# EAGLE board tree-3d-r1-top (EAGLE 5.12)
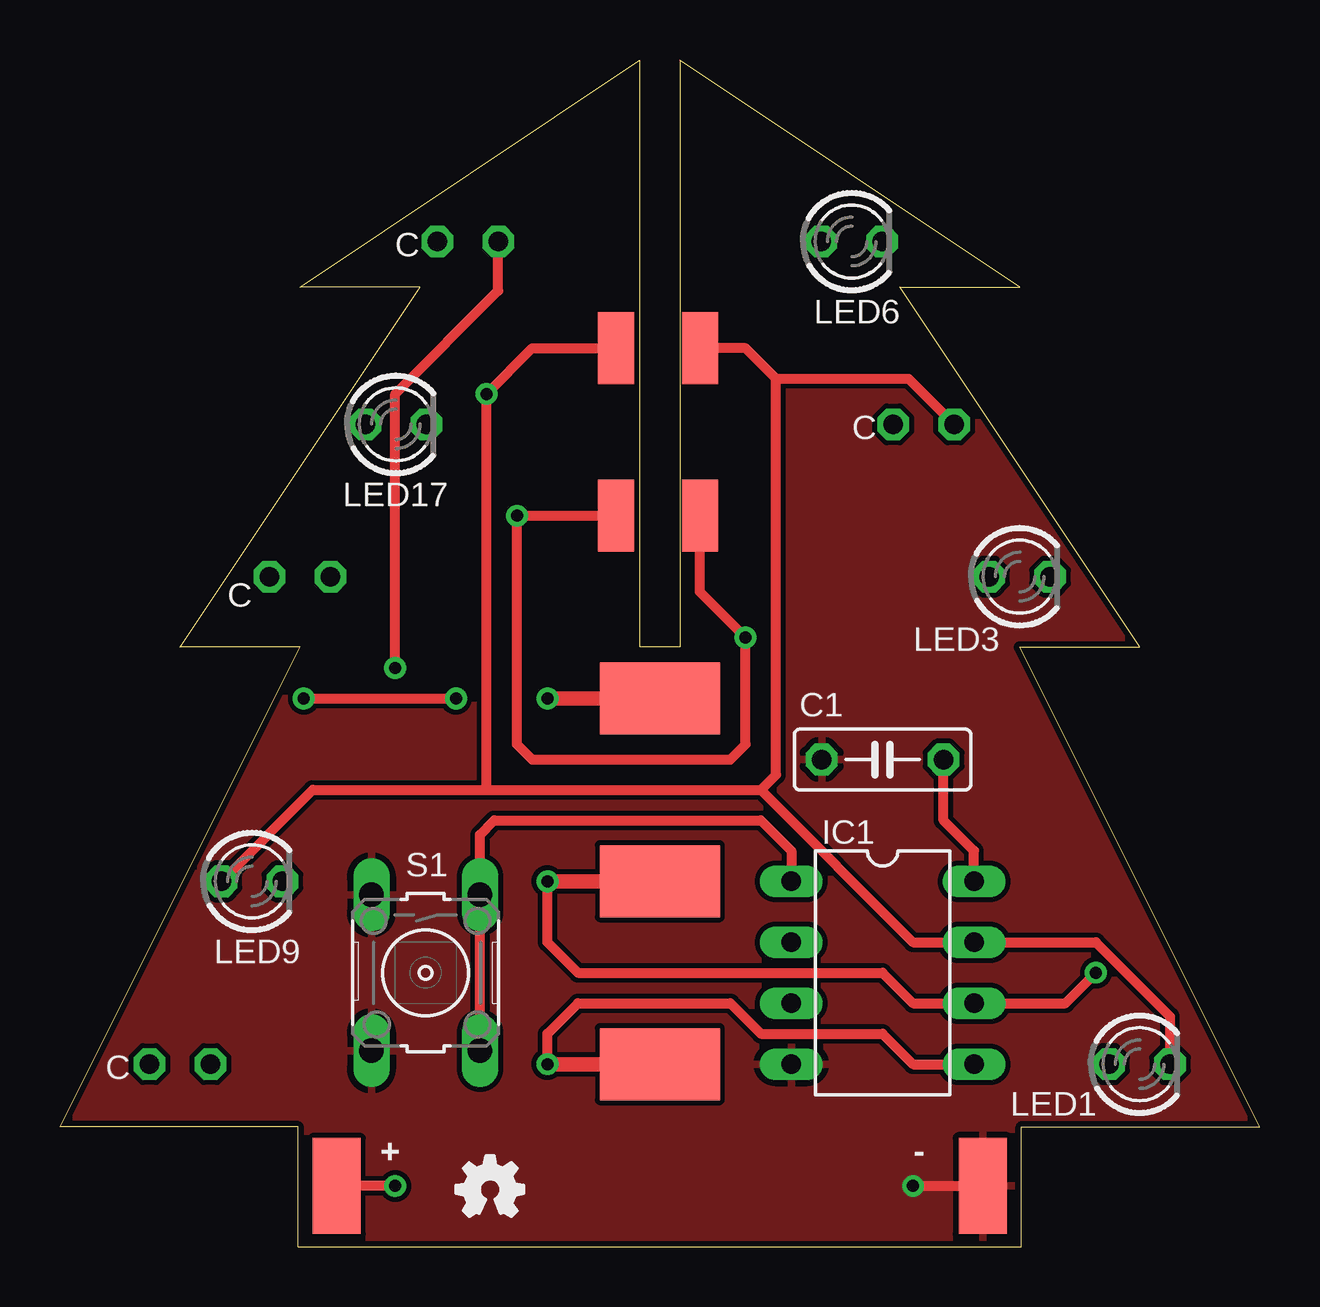
[diagram p0: board, top side]
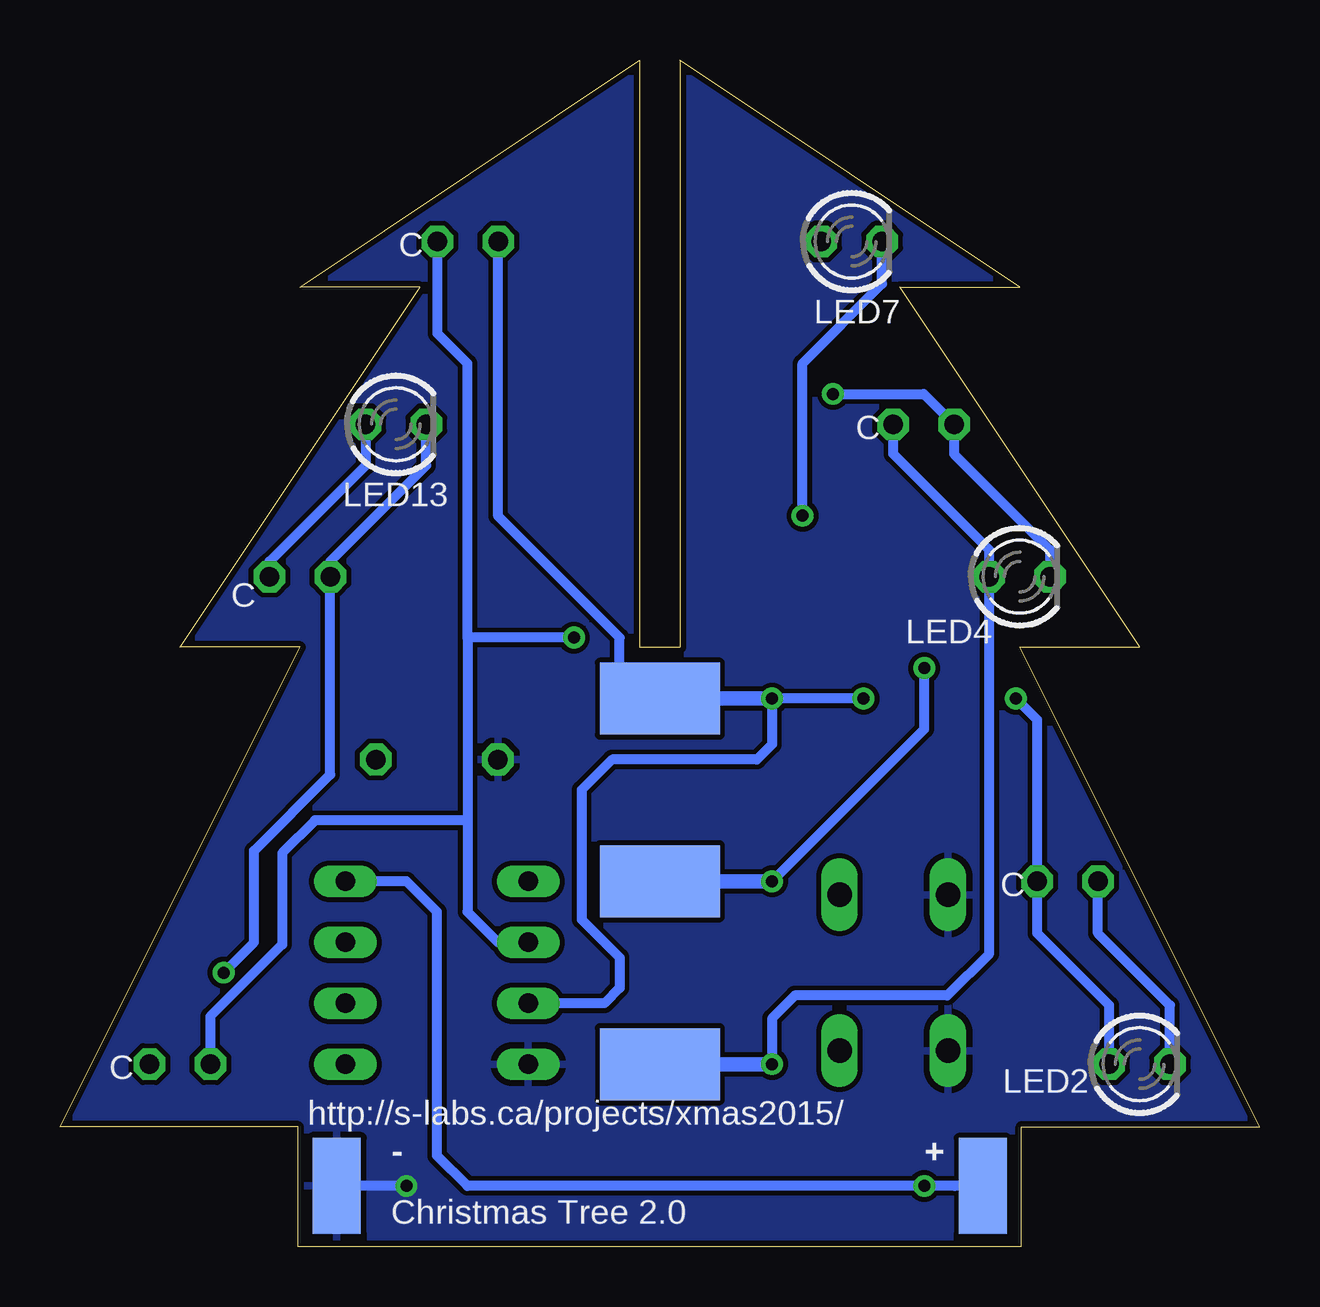
[diagram p1: board, bottom side, seen from below]

Size 50 x 49.48 mm. Coordinates in mm from the lower left corner, seen from the top.
Outline: 9.92,0 9.92,5 0,5 10,25 5,25 15,40 10,40 24.15,49.48 24.15,25 25.85,25 25.85,49.48 40,40 35,40 45,25 40,25 50,5 40.08,5 40.08,0 9.92,0
Copper layers (1*16): Top 0.035mm / dielectric 1.5mm / Bottom 0.035mm
Design rules "default *": minimum track width 10mil, minimum drill 0.5mm, track to track 8mil, track to pad 8mil, pad to pad 8mil, via to via 8mil, smd to smd 8mil, copper to edge 10mil, drill to drill 8mil, minimum pad ring 10mil, minimum via ring 8mil, stop-mask expansion 4mil, vias tented up to drill 0mil, thermal gap 10mil

## Footprints (pad centres in the part's own frame; a part is rotated, then mirrored left to right if it is on the bottom)
C050-025X075 = drill 0.813 octagon: 1 -2.54,0; 2 2.54,0
DIL08 = drill 0.813 long: 1 -3.81,-3.81; 2 -1.27,-3.81; 3 1.27,-3.81; 4 3.81,-3.81; 5 3.81,3.81; 6 1.27,3.81; 7 -1.27,3.81; 8 -3.81,3.81
LED3MM = drill 0.813 octagon: A -1.27,0; K 1.27,0
B3F-10XX = drill 1.016 long: 1 -3.251,2.261; 2 3.251,2.261; 3 -3.251,-2.261; 4 3.251,-2.261
PAD-1.5X3 = smd 3 x 1.5: P$1 0,0
PAD-3X5 = smd 5 x 3: P$1 0,0
PAD-2X4 = smd 4 x 2: P$1 0,0

## Placement (x,y rotation side)
C1  100n  [C050-025X075]  34.29,20.32 180 top
IC1  ATTINY25-20PU  [DIL08]  34.29,11.43 270 top
LED1  [LED3MM]  45,7.62 0 top
LED2  [LED3MM]  5,7.62 0 bottom
LED3  [LED3MM]  40,27.94 0 top
LED4  [LED3MM]  10,27.94 0 bottom
LED6  [LED3MM]  33,41.91 0 top
LED7  [LED3MM]  17,41.91 0 bottom
LED9  [LED3MM]  8,15.24 0 top
LED13  [LED3MM]  36,34.29 0 bottom
LED17  [LED3MM]  14,34.29 0 top
LOGO2  OSHW_LOGO_FILLX0100-NT  [OSHW_FILLX100_NOTEXT]  16.51,1.27 0 top
S1  [B3F-10XX]  15.24,11.43 270 top
X3  PAD-1.5X3  [PAD-1.5X3]  23.18,37.47 90 top
X4  PAD-1.5X3  [PAD-1.5X3]  26.67,37.47 90 top
X5  PAD-1.5X3  [PAD-1.5X3]  23.18,30.48 90 top
X6  PAD-1.5X3  [PAD-1.5X3]  26.67,30.48 90 top
X11  PAD-3X5  [PAD-3X5]  25,22.86 0 bottom
X12  PAD-3X5  [PAD-3X5]  25,22.86 0 top
X15  PAD-3X5  [PAD-3X5]  25,15.24 0 top
X16  PAD-3X5  [PAD-3X5]  25,15.24 0 bottom
X17  PAD-3X5  [PAD-3X5]  25,7.62 0 top
X18  PAD-3X5  [PAD-3X5]  25,7.62 0 bottom
X21  PAD-2X4  [PAD-2X4]  11.54,2.54 270 bottom
X22  PAD-2X4  [PAD-2X4]  11.54,2.54 90 top
X23  PAD-2X4  [PAD-2X4]  38.46,2.54 270 bottom
X24  PAD-2X4  [PAD-2X4]  38.46,2.54 90 top

## Library data of the parts
C1 = rcl
IC1 = avr-5
LED1-LED4 LED6 LED7 LED9 LED13 LED17 = led
LOGO2 = ohw-logo
S1 = rbg-generic-tact-switch
X3-X6 X11 X12 X15-X18 X21-X24 = rbg-generic-pads

## Nets
+3V3: C1.1 IC1.8 X21.P$1 X22.P$1
BUTTON: IC1.1 S1.1 S1.2
CHARLIEPLEX0: IC1.7 LED1.K LED2.K LED3.K LED4.K LED9.A LED13.A LED17.A X3.P$1 X4.P$1
CHARLIEPLEX1: IC1.2 LED1.A LED6.K LED7.K X5.P$1 X6.P$1
CHARLIEPLEX2: IC1.3 LED2.A LED6.A LED9.K X11.P$1 X12.P$1
CHARLIEPLEX3: IC1.6 LED3.A LED7.A LED13.K X15.P$1 X16.P$1
GND: C1.2 IC1.4 S1.3 S1.4 X23.P$1 X24.P$1
S$3: IC1.5 LED4.A LED17.K X17.P$1 X18.P$1

## Tracks (layer width: path | path; a pad name or v marks a point on that pad's centre or on a via)
+3V3  (via drill 0.5)
  Top 0.406: IC1.8 38.1,16.51 36.83,17.78 C1.1 | v13.97,2.54 X21.P$1
  Bottom 0.406: IC1.8 35.56,15.24 34.29,13.97 34.29,3.81 33.02,2.54 v13.97,2.54 12.7,2.54 X21.P$1
BUTTON
  Top 0.406: IC1.1 30.48,16.51 29.21,17.78 18.1,17.78 17.5,17.18 S1.1 S1.2
CHARLIEPLEX0  (via drill 0.5)
  Top 0.406: LED1.K 46.27,9.61 43.18,12.7 IC1.7 35.56,12.7 29.21,19.05 | LED13.A 35.37,36.2 29.84,36.2 | X4.P$1 28.57,37.47 29.84,36.2 | X3.P$1 19.68,37.47 v17.78,35.56 17.78,19.05 | 29.84,36.2 29.84,19.68 29.21,19.05 | 17.78,19.05 29.21,19.05 | 17.78,19.05 10.54,19.05 LED9.A
  Bottom 0.406: LED3.K 41.27,28.58 37.27,32.58 LED13.A | LED4.K 8.73,29.05 12.73,33.05 LED17.A 14,35.56 v17.78,35.56 | LED9.A 6.73,13.08 3.73,10.08 LED2.K
CHARLIEPLEX1  (via drill 0.5)
  Top 0.406: X5.P$1 v19.05,30.48 19.05,20.95 19.68,20.32 27.94,20.32 28.57,20.95 v28.57,25.4 26.67,27.3 X6.P$1
  Bottom 0.406: LED7.K 15.73,40.15 19.05,36.83 v19.05,30.48 | LED1.A 43.73,9.61 40.73,12.61 40.73,16.42 39.37,17.78 33.02,17.78 | LED6.K 34.27,38.08 33.02,36.83 33.02,25.4 | v28.57,25.4 33.02,25.4 | 33.02,25.4 33.02,17.78 | 33.02,17.78 33.02,13.97 31.75,12.7 IC1.2
CHARLIEPLEX2  (via drill 0.5)
  Top 0.406: v10.16,22.86 v16.51,22.86
  Top 0.61: v20.32,22.86 X12.P$1
  Bottom 0.406: IC1.3 27.3,10.16 26.67,10.79 26.67,12.06 28.26,13.65 28.26,19.05 26.99,20.32 20.95,20.32 20.32,20.95 v20.32,22.86 v16.51,22.86 | LED6.A 31.73,30.46 26.67,25.4 26.67,24.13 25.4,22.86 X12.P$1 | v10.16,22.86 9.27,21.97 LED9.K 9.27,13.08 6.27,10.08 LED2.A
  Bottom 0.61: v20.32,22.86 X12.P$1
CHARLIEPLEX3  (via drill 0.5)
  Top 0.406: LED7.A 18.27,39.86 13.97,35.56 v13.97,24.13 | v43.18,11.43 41.91,10.16 IC1.6 35.56,10.16 34.29,11.43 21.59,11.43 20.32,12.7 v20.32,15.24
  Top 0.61: v20.32,15.24 X16.P$1
  Bottom 0.406: LED13.K 34.73,32.58 38.73,28.58 LED3.A 38.73,19.69 41.91,16.51 41.91,12.7 v43.18,11.43 | v13.97,24.13 13.97,21.59 v20.32,15.24
  Bottom 0.61: v20.32,15.24 X16.P$1
GND  (via drill 0.5)
  Top 0.406: v35.56,2.54 X24.P$1
  Bottom 0.406: v35.56,2.54 X24.P$1
  pour Top: -1.27,-1.27 50.8,-1.27 50.8,49.53 -1.27,49.53
  pour Bottom: -1.27,-1.27 50.8,-1.27 50.8,49.53 -1.27,49.53
S$3  (via drill 0.5)
  Top 0.406: v20.32,7.62 20.32,8.89 21.59,10.16 27.94,10.16 29.21,8.89 34.29,8.89 35.56,7.62 IC1.5
  Top 0.61: v20.32,7.62 X17.P$1
  Bottom 0.406: LED17.K 15.27,33.05 11.27,29.05 LED4.A 11.27,12.22 13.02,10.48 19.37,10.48 20.32,9.53 v20.32,7.62
  Bottom 0.61: v20.32,7.62 X17.P$1

## Text on the board
tNames: C | C | C | C | + | -
bNames: C | C | C | C | C | http://s-labs.ca/projects/xmas2015/ | + | - | Christmas Tree 2.0